# Altium PCB Drone-PCB-v1-ASCII.PcbDoc
Units mil, origin at the board's own origin, x right, y up, seen from the top; angles counter-clockwise.
Board outline 3936.81 x 3930.99 mil, 2 copper layers (Top Layer, Bottom Layer); 82 components, 50 nets, 283 pads, 84 vias.
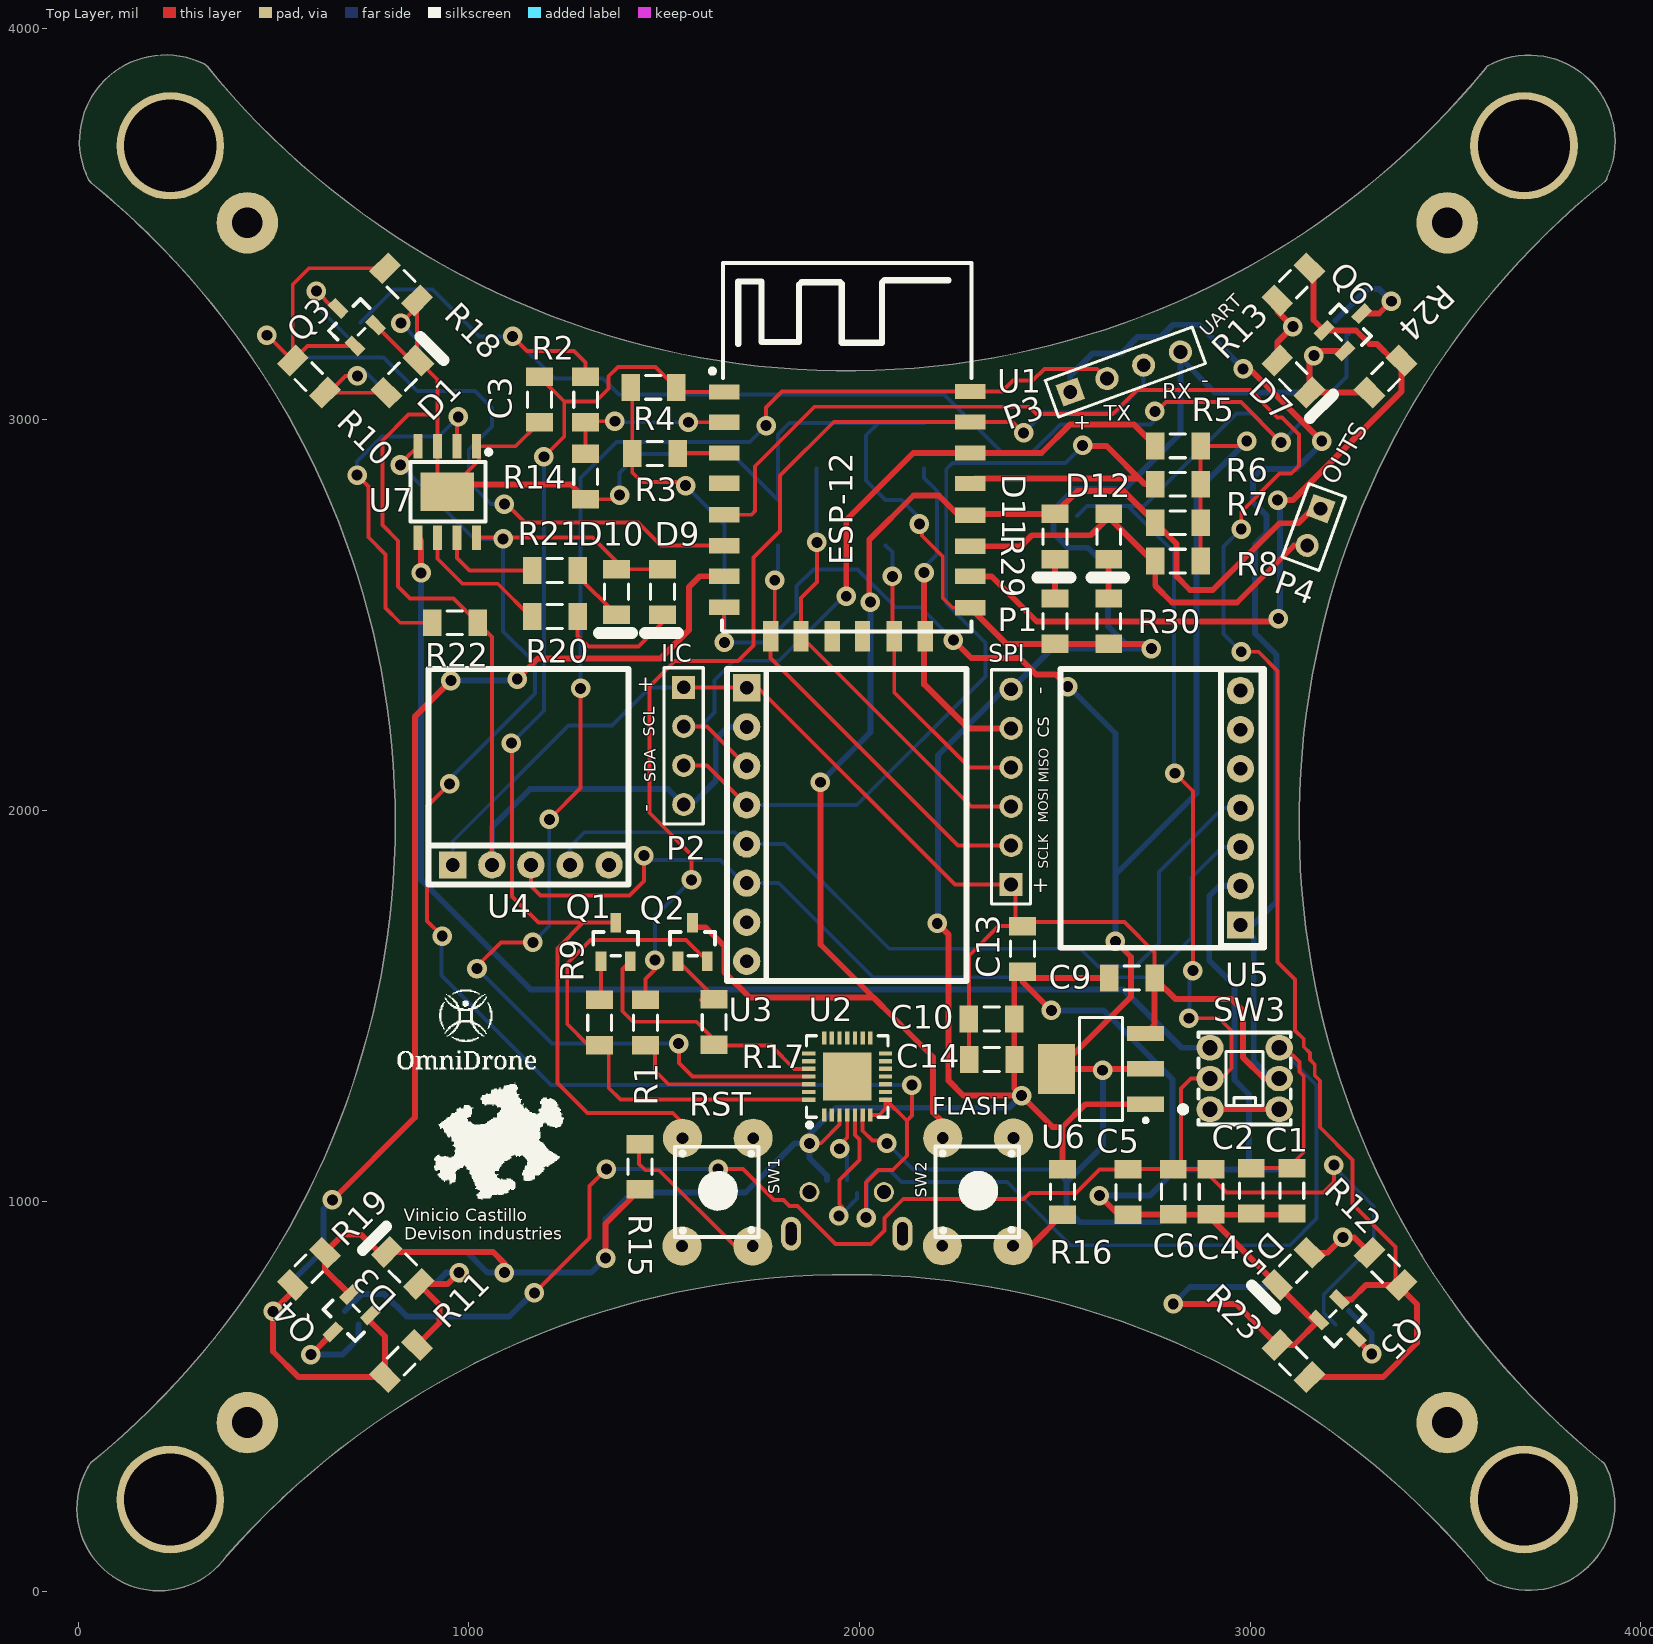
[diagram p0: Top Layer view]
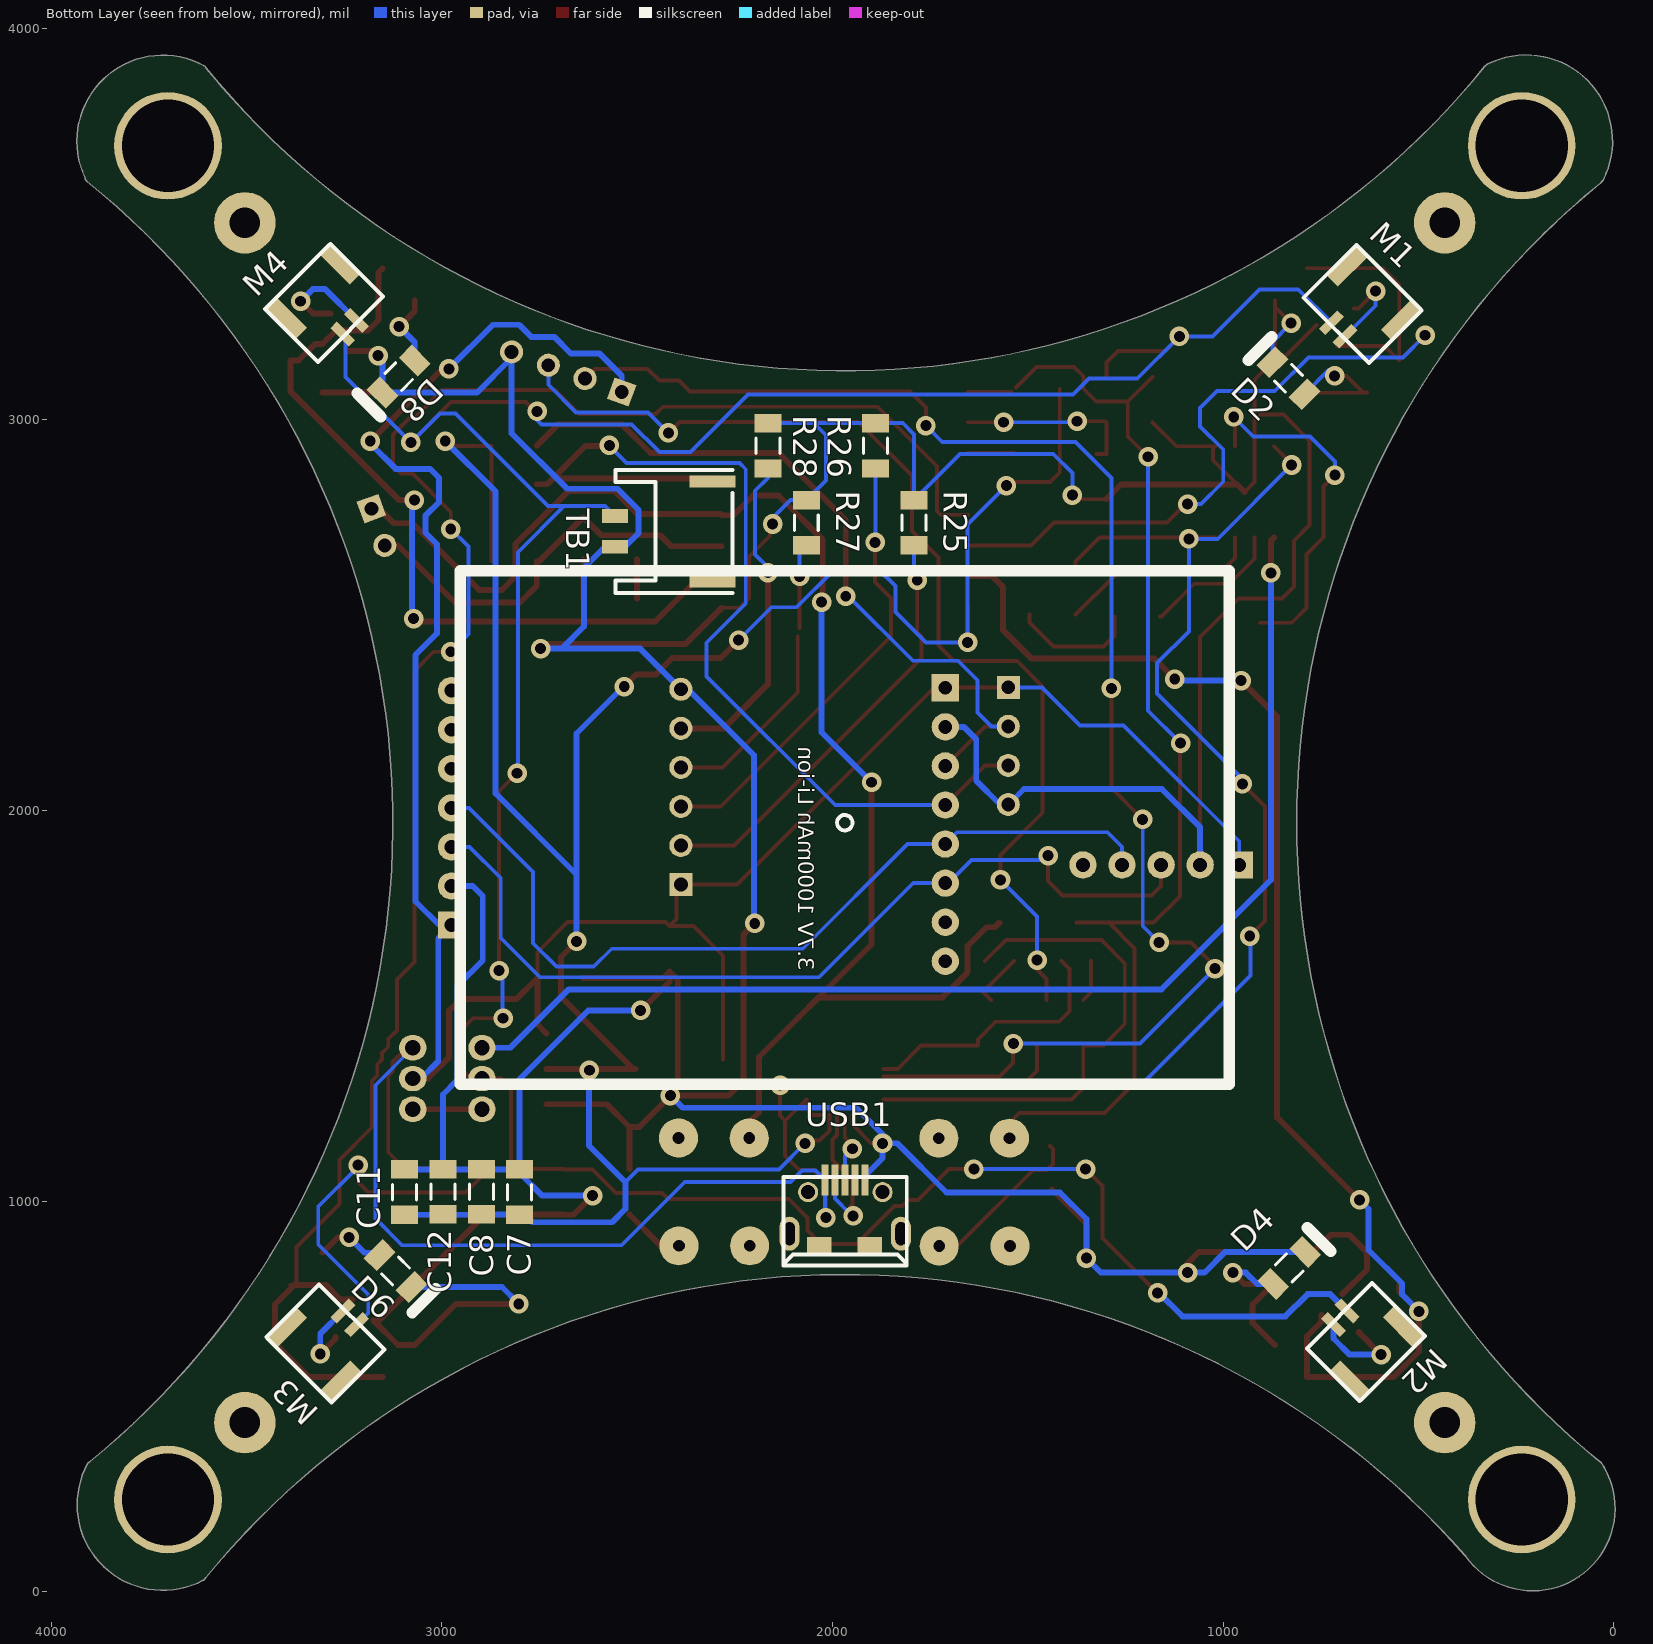
[diagram p1: Bottom Layer view, seen from below]

## Layer stack, top to bottom
Top Layer: signal copper 1.4
Dielectric: dielectric 12.6, FR-4, Dk 4.8
Bottom Layer: signal copper 1.4

## Board outline
31.88,329.67 ccw(c207.88,213.47) 380.49,92.3 ccw(c370.4,103.42) 381.69,93.52 cw(c1968.5,-1299.21) 3603.55,36.56 ccw(c3615.18,46.06) 3604.94,35.08 ccw(c3618.01,42.48) 3610.99,29.21 ccw(c3713.6,223.24) 3933.08,223.24 ccw(c3713.6,223.24) 3906.95,327.12 ccw(c3893.72,320.01) 3900.49,333.41 3900.5,333.41 cw(c5236.22,1968.5) 3907.62,3609.39 ccw(c3898.17,3621.06) 3913.12,3619.7 ccw(c3713.77,3712.83) 3933.8,3712.83 ccw(c3713.77,3712.83) 3609.28,3906.46 ccw(c3616.41,3893.25) 3602.73,3899.44 cw(c1968.5,5236.22) 330.3,3904.31 ccw(c318.65,3894.84) 326.06,3907.9 ccw(c315.48,3897.25) 322.14,3910.71 ccw(c224.25,3712.95) 27.17,3613.69 ccw(c40.58,3620.45) 32.4,3607.86 ccw(c44.96,3616.08) 35.47,3604.45 cw(c-1299.21,1968.5) 812.11,1968.5 cw(c-1299.21,1968.5) 38.9,335.36 ccw(c44.41,321.4)

## Design rules (kind name [scope] priority, off if disabled: settings)
AssemblyTestPointUsage [All] p0: scope1count=1 scope1_0_kind=Board scope1_0_value=Board scope2count=1 scope2_0_kind=Board scope2_0_value=Board commentlength=0
AssemblyTestpoint [All] p0: scope1count=1 scope1_0_kind=Board scope1_0_value=Board scope2count=1 scope2_0_kind=Board scope2_0_value=Board commentlength=0
Clearance [All] p0: scope1count=1 scope1_0_kind=Board scope1_0_value=Board scope2count=1 scope2_0_kind=Board scope2_0_value=Board commentlength=0 gap=5
Clearance [All] p1: gap=5
ComponentClearance [All] p0: scope1count=1 scope1_0_kind=Board scope1_0_value=Board scope2count=1 scope2_0_kind=Board scope2_0_value=Board commentlength=0 gap=0.39 collisioncheckmode=3
ComponentClearance [All] p1: gap=0.39 collisioncheckmode=3 verticalgap=10 showdistances=FALSE
DiffPairsRouting [All] p0: scope1count=1 scope1_0_kind=Board scope1_0_value=Board scope2count=1 scope2_0_kind=Board scope2_0_value=Board commentlength=0
FabricationTestPointUsage [All] p0: scope1count=1 scope1_0_kind=Board scope1_0_value=Board scope2count=1 scope2_0_kind=Board scope2_0_value=Board commentlength=0 valid=0 allowmultiple=FALSE
FabricationTestpoint [All] p0: scope1count=1 scope1_0_kind=Board scope1_0_value=Board scope2count=1 scope2_0_kind=Board scope2_0_value=Board commentlength=0 side=3 testpointundercomponent=TRUE minsize=40 maxsize=100 preferedsize=60 minholesize=0 maxholesize=40 preferedholesize=32 testpointgrid=1
FanoutControl Fanout_Default [All] p0: scope1count=1 scope1_0_kind=Board scope1_0_value=Board scope2count=1 scope2_0_kind=Board scope2_0_value=Board commentlength=30 // Fanout_Default (Default Rule)
FanoutControl Fanout_Small [All] p0 off: scope1count=1 scope1_0_kind=Board scope1_0_value=Board scope2count=1 scope2_0_kind=Board scope2_0_value=Board commentlength=84 // Protel DXP Scope 1 Expression Was: (CompPinCount < 5)   Fanout_Small (Default Rule)
FanoutControl Fanout_SOIC [All] p0 off: scope1count=1 scope1_0_kind=Board scope1_0_value=Board scope2count=1 scope2_0_kind=Board scope2_0_value=Board commentlength=71 // Protel DXP Scope 1 Expression Was: IsSOIC   Fanout_SOIC (Default Rule)
FanoutControl Fanout_LCC [All] p0 off: scope1count=1 scope1_0_kind=Board scope1_0_value=Board scope2count=1 scope2_0_kind=Board scope2_0_value=Board commentlength=69 // Protel DXP Scope 1 Expression Was: IsLCC   Fanout_LCC (Default Rule)
FanoutControl Fanout_BGA [All] p0 off: scope1count=1 scope1_0_kind=Board scope1_0_value=Board scope2count=1 scope2_0_kind=Board scope2_0_value=Board commentlength=69 // Protel DXP Scope 1 Expression Was: IsBGA   Fanout_BGA (Default Rule)
Height [All] p0: scope1count=1 scope1_0_kind=Board scope1_0_value=Board scope2count=1 scope2_0_kind=Board scope2_0_value=Board commentlength=0
HoleSize [All] p0: scope1count=1 scope1_0_kind=Board scope1_0_value=Board scope2count=1 scope2_0_kind=Board scope2_0_value=Board commentlength=0 absolutevalues=TRUE maxlimit=100 minlimit=1 maxpercent=80.000 minpercent=20.000
HoleToHoleClearance [All] p0: scope1count=1 scope1_0_kind=Board scope1_0_value=Board scope2count=1 scope2_0_kind=Board scope2_0_value=Board commentlength=0
LayerPairs [All] p0: scope1count=1 scope1_0_kind=Board scope1_0_value=Board scope2count=1 scope2_0_kind=Board scope2_0_value=Board commentlength=0 enforce=TRUE
MinimumSolderMaskSliver [All] p0: scope1count=1 scope1_0_kind=Board scope1_0_value=Board scope2count=1 scope2_0_kind=Board scope2_0_value=Board commentlength=0
NetAntennae [All] p0: scope1count=1 scope1_0_kind=Board scope1_0_value=Board scope2count=1 scope2_0_kind=Board scope2_0_value=Board commentlength=0
PasteMaskExpansion [All] p0: scope1count=1 scope1_0_kind=Board scope1_0_value=Board scope2count=1 scope2_0_kind=Board scope2_0_value=Board commentlength=0 expansion=0
PlaneClearance [All] p0: scope1count=1 scope1_0_kind=Board scope1_0_value=Board scope2count=1 scope2_0_kind=Board scope2_0_value=Board commentlength=0 clearance=20
PlaneConnect [All] p0: scope1count=1 scope1_0_kind=Board scope1_0_value=Board scope2count=1 scope2_0_kind=Board scope2_0_value=Board commentlength=0 planeconnectstyle=Relief reliefexpansion=20 reliefentries=4 reliefconductorwidth=10 reliefairgap=10
PolygonConnect [All] p0: scope1count=1 scope1_0_kind=Board scope1_0_value=Board scope2count=1 scope2_0_kind=Board scope2_0_value=Board commentlength=0 connectstyle=Relief reliefconductorwidth=10 reliefentries=4 polygonreliefangle="90 Angle"
PolygonConnect [All] p1: connectstyle=Relief reliefconductorwidth=10 reliefentries=4 polygonreliefangle="90 Angle" airgapwidth=10
RoutingCorners [All] p0: scope1count=1 scope1_0_kind=Board scope1_0_value=Board scope2count=1 scope2_0_kind=Board scope2_0_value=Board commentlength=0 cornerstyle=45-Degree minsetback=100 maxsetback=100
RoutingLayers [All] p0: scope1count=1 scope1_0_kind=Board scope1_0_value=Board scope2count=1 scope2_0_kind=Board scope2_0_value=Board commentlength=0 top layer=Automatic bottom layer=Automatic
RoutingPriority [All] p0: scope1count=1 scope1_0_kind=Board scope1_0_value=Board scope2count=1 scope2_0_kind=Board scope2_0_value=Board commentlength=0
RoutingTopology [All] p0: scope1count=1 scope1_0_kind=Board scope1_0_value=Board scope2count=1 scope2_0_kind=Board scope2_0_value=Board commentlength=0 topology=Shortest
RoutingVias [All] p0: scope1count=1 scope1_0_kind=Board scope1_0_value=Board scope2count=1 scope2_0_kind=Board scope2_0_value=Board commentlength=0 holewidth=28 width=50 viastyle="Through Hole" minholewidth=28 minwidth=50 maxholewidth=28 maxwidth=50
RoutingVias [All] p1: holewidth=28 width=50 viastyle="Through Hole" minholewidth=28 minwidth=50 maxholewidth=28 maxwidth=50
ShortCircuit [All] p0: scope1count=1 scope1_0_kind=Board scope1_0_value=Board scope2count=1 scope2_0_kind=Board scope2_0_value=Board commentlength=0 allowed=FALSE
SilkToSilkClearance [All] p0: scope1count=1 scope1_0_kind=Board scope1_0_value=Board scope2count=1 scope2_0_kind=Board scope2_0_value=Board commentlength=0
SilkToSolderMaskClearance [All] p0 off: scope1count=1 scope1_0_kind=Board scope1_0_value=Board scope2count=1 scope2_0_kind=Board scope2_0_value=Board commentlength=44 // Protel DXP Scope 1 Expression Was: IsPad
SolderMaskExpansion [All] p0: scope1count=1 scope1_0_kind=Board scope1_0_value=Board scope2count=1 scope2_0_kind=Board scope2_0_value=Board commentlength=0 expansion=4
SolderMaskExpansion [All] p1: expansion=4
UnRoutedNet [All] p0: scope1count=1 scope1_0_kind=Board scope1_0_value=Board scope2count=1 scope2_0_kind=Board scope2_0_value=Board commentlength=0
Width [All] p0: scope1count=1 scope1_0_kind=Board scope1_0_value=Board scope2count=1 scope2_0_kind=Board scope2_0_value=Board commentlength=0 maxlimit=30 minlimit=10 preferedwidth=15
Width [All] p1: maxlimit=30 minlimit=10 preferedwidth=15
27 further rules are at their usual default settings.

## Components (designator, comment, footprint, x,y, rotation, side; value= is the part's Value field where it differs from the comment)
C1 "10uF" 1206CAP 3106.46,1026.38 r90 top
C2 "100nF" 1206CAP 3002.57,1026.38 r90 top
C3 "100nF" 1206CAP 1181.1,3051.18 r90 top
C4 "100uF" 1206CAP 2900,1024 r90 top
C5 "100nF" 1206CAP 2687,1023 r90 top
C6 "100nF" 1206CAP 2803,1024 r90 top
C7 "10uF" 1206CAP 2801,1023 r270 bottom
C8 "10uF" 1206CAP 2898,1024 r270 bottom
C9 "10uF" 1206CAP 2697,1571 r0 top
C10 "10uF" 1206CAP 2338,1466 r180 top
C11 "100nF" 1206CAP 3095,1023 r270 bottom
C12 "100nF" 1206CAP 2997,1024 r270 bottom
C13 "100nF" 1206CAP 2417.32,1645.67 r90 top
C14 "100nF" 1206CAP 2338.58,1362.2 r180 top
D1 "LED" 1206DIODE 830,3110 r45 top
D2 "LED" 1206DIODE 833,3106 r45 bottom
D3 "LED" 1206DIODE 831,829 r135 top
D4 "LED" 1206DIODE 831,829 r135 bottom
D5 "LED" 1206DIODE 3110.24,826.77 r225 top
D6 "LED" 1206DIODE 3118,821 r225 bottom
D7 "LED" 1206DIODE 3110.24,3110.24 r315 top
D8 "LED" 1206DIODE 3110.24,3110.24 r315 bottom
D9 "LED" 1206DIODE 1496.06,2559.06 r270 top
D10 "LED" 1206DIODE 1377.95,2559.06 r270 top
D11 "LED" 1206DIODE 2500,2700.79 r270 top
D12 "LED" 1206DIODE 2637.8,2700.79 r270 top
M1 "TBX2X1" "JST 1.25mm" 794,3312 r225 bottom
M2 "TBX2X1" "JST 1.25mm" 619,790 r315 bottom
M3 "TBX2X1" "JST 1.25mm" 3147,620 r45 bottom
M4 "TBX2X1" "JST 1.25mm" 3317,3148 r135 bottom
P1 "SPI" HDR1X6 2388,1810 r90 top
P2 "IIC" HDR1X4 1550,2315 r270 top
P3 "UART" HDR1X4 2539.37,3070.87 r20 top
P4 "OUTS" HDR1X2 3180,2772 r250 top
Q1 "S8050" SOT-23(SOT-23-3) 1338.58,1614.17 r0 top
Q2 "S8050" SOT-23(SOT-23-3) 1535.43,1614.17 r0 top
Q3 "SI2302" SOT-23(SOT-23-3) 708.66,3188.98 r45 top
Q4 "SI2302" SOT-23(SOT-23-3) 748.03,708.66 r135 top
Q5 "SI2302" SOT-23(SOT-23-3) 3228.35,748.03 r225 top
Q6 "SI2302" SOT-23(SOT-23-3) 3188.98,3228.35 r315 top
R1 "470" 1206RES 1452,1457 r90 top
R2 "12K" 1206RES 1299.21,3051.18 r270 top
R3 "3K3" 1206RES 1476.38,2913.39 r180 top
R4 "3K3" 1206RES 1472.44,3082.68 r180 top
R5 "3K3" 1206RES 2814.96,2933.07 r0 top
R6 "3K3" 1206RES 2814.96,2834.65 r0 top
R7 "3K3" 1206RES 2814.96,2736.22 r0 top
R8 "3K3" 1206RES 2814.96,2637.8 r0 top
R9 "12K" 1206RES 1335,1457 r90 top
R10 "470" 1206RES 590.55,3110.24 r135 top
R11 "470" 1206RES 826.77,590.55 r225 top
R12 "470" 1206RES 3346.46,826.77 r315 top
R13 "470" 1206RES 3110.24,3346.46 r45 top
R14 "12K" 1206RES 1299.21,2854.33 r270 top
R15 "470" 1206RES 1438,1088 r90 top
R16 "470" 1206RES 2519.68,1023.62 r270 top
R17 "12K" 1206RES 1628,1458 r90 top
R18 "33K" 1206RES 826.77,3346.46 r315 top
R19 "33K" 1206RES 590.55,826.77 r45 top
R20 "1.2K" 1206RES 1220.47,2496.06 r180 top
R21 "1.2K" 1206RES 1220.47,2614.17 r180 top
R22 "1.2K" 1206RES 964.57,2480.32 r180 top
R23 "33K" 1206RES 3110.24,590.55 r135 top
R24 "33K" 1206RES 3346.46,3110.24 r225 top
R25 "3K3" 1206RES 1791.34,2736.22 r270 bottom
R26 "3K3" 1206RES 1889.76,2933.07 r270 bottom
R27 "3K3" 1206RES 2066.93,2736.22 r270 bottom
R28 "3K3" 1206RES 2165.35,2933.07 r270 bottom
R29 "470" 1206RES 2500,2484.25 r270 top
R30 "470" 1206RES 2637.8,2484.25 r270 top
SW1 "PUSH BUTTON" "Push Button" 1633.86,1022.62 r0 top
SW2 "PUSH BUTTON" "Push Button" 2300,1023 r0 top
SW3 "SW DPDT" "DPDT SW" 2897,1235 r0 top
TB1 "TB_BATT" "2P PH2.0mm Pitch" 2594,2876 r270 bottom
U1 "ESP-12E" ESP-12E 1653.5,3070.87 r0 top
U2 "CP2102" CP2102 1968.5,1318.9 r90 top
U3 "MPU6050" "MPU6050 - PCB MODULE" 1661.2,1563.8 r0 top
U4 "HMC5883L" "HMC5883L - PCB MODULE" 1409,1810.33 r90 top
U5 "MS5611" "MS5611 - PCB MODULE" 3035,2361.51 r180 top
U6 "KIA1117-3.3" KIA1117-3.3 2618.11,1338.58 r180 top
U7 "TP4056" TP4056 944.88,2814.96 r270 top
USB1 "USB Connector" "USB micro Female" 2127.4,1063 r270 bottom

## Footprints (in the part's own frame and the unit in brackets; to place one, negate y for a bottom-side part, rotate by r counter-clockwise, add the part's x,y. Pads: shape width x height; smd on the part's side, far side on the other; paste and mask are expansions set on the pad)
"2P PH2.0mm Pitch" [mm]
  rect 0.9x1.7 smd: 1(3.116,0.94) 2(5.116,0.94)
  rect 0.8x3 smd: MP1(7.366,7.29) MP2(0.866,7.29)
  silkscreen extent 0.12,0.99 8.12,8.59
1206CAP [mm] "Chip Resistor, 2-Leads, Body 3,10x1,57mm, IPC Medium Density"
  rect 1.2x1.75 smd: 1(-1.475,0) 2(1.475,0)
  silkscreen extent -0.5,-0.77 0.5,0.77
1206DIODE [mm]
  rect 1.2x1.75 smd: 1(-1.475,0) 2(1.475,0)
  silkscreen extent -0.5,-1.14 2.67,1.02
1206RES [mm] "Chip Resistor, 2-Leads, Body 3,10x1,57mm, IPC Medium Density"
  rect 1.2x1.75 smd: 1(-1.475,0) 2(1.475,0)
  silkscreen extent -0.5,-0.77 0.5,0.77
CP2102 [mm] "USB to UART Interface IC 3.3v"
  rect 0.85x0.28 smd: 1(-2.5,1.501) 2(-2.5,1.001) 3(-2.5,0.5) 4(-2.5,0) 5(-2.5,-0.5) 6(-2.5,-1.001) 7(-2.5,-1.501) 15(2.5,-1.501) 16(2.5,-1.001) 17(2.5,-0.5) 18(2.5,0) 19(2.5,0.5) 20(2.5,1.001) 21(2.5,1.501)
  rect 0.28x0.85 smd: 8(-1.501,-2.5) 9(-1.001,-2.5) 10(-0.5,-2.5) 11(0,-2.5) 12(0.5,-2.5) 13(1.001,-2.5) 14(1.501,-2.5) 22(1.501,2.5) 23(1.001,2.5) 24(0.5,2.5) 25(0,2.5) 26(-0.5,2.5) 27(-1.001,2.5) 28(-1.501,2.5)
  rect 3.13x3.13 smd: 10(0,0)
  silkscreen extent -3.3,-2.65 2.65,2.65
"DPDT SW" [mil] "DPDT Switch"
  oval 70x65 hole 39.37: 1(0,0) 2(0,78.74) 3(0,157.48) 4(177.16,0) 5(177.16,78.74) 6(177.16,157.48)
  silkscreen extent -77,-39 207,197
ESP-12E [mm] "ESP8266 MCU based WIFI PCB Module"
  rect 2x1 smd: 1(0,0) 2(0,-1.97) 3(0,-3.97) 4(0,-5.94) 5(0,-7.98) 6(0,-9.99) 7(0,-11.98) 8(0,-13.99) 15(16,-14.03) 16(16,-11.99) 17(16,-10.03) 18(16,-8.01) 19(16,-5.95) 20(16,-3.97) 21(16,-1.95) 22(16,0.03)
  rect 1x2 smd: 9(3.018,-15.877) 10(4.998,-15.877) 11(7.018,-15.877) 12(8.998,-15.877) 13(11.058,-15.877) 14(13.078,-15.877)
  silkscreen extent -0.91,-15.57 16.08,8.37
HDR1X2 [mm] "Connector; Header; 2 Position"
  rect 1.5x1.5 hole 0.9: 1(0,0)
  round 1.5 hole 0.9: 2(2.54,0)
  silkscreen extent -1.27,-1.27 3.81,1.27
HDR1X4 [mm] "Connector; Header; 4 Position"
  rect 1.5x1.5 hole 0.9: 1(0,0)
  round 1.5 hole 0.9: 2(2.54,0) 3(5.08,0) 4(7.62,0)
  silkscreen extent -1.27,-1.27 8.89,1.27
HDR1X6 [mm] "Connector; Header; 6 Position"
  rect 1.5x1.5 hole 0.9: 1(0,0)
  round 1.5 hole 0.9: 2(2.54,0) 3(5.08,0) 4(7.62,0) 5(10.16,0) 6(12.7,0)
  silkscreen extent -1.27,-1.27 13.97,1.27
"HMC5883L - PCB MODULE" [mil] "HMC5883L or QMC5883L"
  rect 70x70 hole 35.43: 1(50,450)
  round 70 hole 35.43: 2(50,350) 3(50,250) 4(50,150) 5(50,50)
  silkscreen extent 0,0 551,512
"JST 1.25mm" [mm] "JST 1.25mm, 2 pins, SMD"
  rect 0.6x1.7 smd: 1(2.423,0.13) 2(3.673,0.13)
  rect 1x2.8 smd: 3(0.573,3.48) 4(5.523,3.48)
  silkscreen extent 0,0 5.99,4.85
KIA1117-3.3 [mm] "LOD and Fixed positive voltage regulator 3.3V 1A"
  rect 2.4x1 smd: 1(-2.9,2.3) 2(-2.9,0) 3(-2.9,-2.3)
  rect 2.4x3.25 smd: 2(2.9,0)
  silkscreen extent -3.03,-3.35 1.4,3.47
"MPU6050 - PCB MODULE" [mil] "3 Axis Analog Gyro Sensors+ 3 Axis Accelerometer Module, IIC"
  rect 70x70 hole 35.43: 1(50,750)
  round 70 hole 35.43: 2(50,650) 3(50,550) 4(50,450) 5(50,350) 6(50,250) 7(50,150) 8(50,50)
  silkscreen extent 0,0 613,798
"MS5611 - PCB MODULE" [mil] "MS5611-01BA03 Atmospheric Pressure Sensor Module Meter Altimeter Sensor Module, IIC/SPI"
  rect 70x70 hole 35.43: 1(60,655)
  round 70 hole 35.43: 2(60,555) 3(60,455) 4(60,355) 5(60,255) 6(60,155) 7(60,55)
  silkscreen extent 0,0 521,713
"Push Button" [mil]
  round 100 hole 30: 0(-88,-137.5) 0(94,138.5) 1(-87,138.5) 2(93,-137.5)
  silkscreen extent -106,-114 108,116
SOT-23(SOT-23-3) [mm] "SOT-23(SOT-23-3) Package"
  rect 0.7x1.25 smd: 1(0,0) 2(1.9,0) 3(0.95,2.499)
  silkscreen extent -0.51,0.35 2.41,1.9
TP4056 [mm] "1A Standalone Linear Li-lon Battery Charger with Thermal  Regulation in SOP-8"
  rect 1.6x0.6 smd: 1(-2.972,1.905) 2(-2.972,0.635) 3(-2.972,-0.635) 4(-2.972,-1.905) 5(2.972,-1.905) 6(2.972,-0.635) 7(2.972,0.635) 8(2.972,1.905)
  rect 2.5x3.5 smd: 3(0,0)
  silkscreen extent -2.74,-2.39 1.93,2.84
"USB micro Female" [mm] "MICRO USB 5S B Type"
  round 1.3 hole 0.9: 0(1.016,1.651) 0(1.016,6.492)
  oval 2.2x1.3 hole 0.7 slot 1.5 at 0 deg: 0(3.716,0.442) 0(3.716,7.681)
  rect 1.2x1.6 smd: 0(4.527,2.378) 0(4.543,5.657)
  rect 2x0.45 smd: 1(0.231,2.751) 2(0.231,3.401) 3(0.231,4.051) 4(0.231,4.701) 5(0.231,5.351)
  silkscreen extent 0.03,0.06 5.79,8.06

## Part data
C1 C2 C3 C4 C5 C6 C7 C8 C9 C10 C11 C12 C13 C14: library part Capacitor
D1 D2 D3 D4 D5 D6 D7 D8 D9 D10 D11 D12: "Ligth Emitting Diode (LED)"
M1 M2 M3 M4: "Terminal Block 2 pins, 1 row"
P1: library part "Header 6", "Header, 6-Pin"
P2 P3: library part "Header 4", "Header, 4-Pin"
P4: library part "Header 2", "Header, 2-Pin"
Q1 Q2: "Transistor NPN 500mA 25V SOT-23(SOT-23-3) RoHS"
Q3 Q4 Q5 Q6: "MOSFET N Trench 20V 2.1A 1.2V @ 50uA 72 mO @ 3.6A,4.5V SOT-23(SOT-23-3) RoHS"
R1 R2 R3 R4 R5 R6 R7 R8 R9 R10 R11 R12 R13 R14 R15 R16 R17 R18 R19 R20 R21 R22 R23 R24 R25 R26 R27 R28 R29 R30: library part Resistor, "Passive component"
SW1 SW2: "Normally Open (NO) button"
SW3: "DPDT Switch"
TB1: "Battery terminal block"
U1: "ESP8266 MCU based WIFI PCB Module"
U2: "USB to UART interface IC 3.3v"
U3: "PCB Module, 3 Axis Analog Gyro Sensors+ 3 Axis Accelerometer, IIC"
U4: "PCB Module, Triple Axis Compass Magnetometer Sensor Module, IIC Conn"
U5: "PCB Module, Atmospheric Pressure Sensor Module Meter Altimeter Sensor Module, IIC"
U6: "LOD and Fixed positive voltage regulator 3.3V 1A"
U7: "1A Standalone Linear Li-lon Battery Charger with Thermal  Regulation in SOP-8"
USB1: library part USB

## Free pads (board coordinates)
  round 275.59 hole 236.22: 0(236.22,236.22) 0(236.22,3700.79) 0(3700.79,236.22) 0(3700.79,3700.79)
  round 157.48 hole 78.74: 0(433.07,433.07) 0(433.07,3503.94) 0(3503.94,433.07) 0(3503.94,3503.94)

## Via types
v1: diameter 50, hole 28, Top Layer to Bottom Layer, 84 vias

## Nets (pads, with @x,y where several pads share a name; then routed paths per layer and width w, separated by ;. In a path a pad name is that pad's centre, name@x,y a point inside that pad or via, vN(x,y) a via of type N, cw(c..) or ccw(c..) an arc to the next point about the centre after c; other vN are vias at no path point)
3.3V: C7.2 C8.2 C11.2 C12.2 R3.2 R4.2 R5.2 R6.2 R7.2 R8.2 U1.8 U2.6 U6.2 | length 6606.3
  Top Layer w10: R4.2@1418.31,3078.74 R3.2 1418.31,2864.69 1443,2840 1564,2840 v1(1555,2831) ; U1.8 1653.5,2430.5 v1(1654,2430) ; U2.6 2007.9,1180.1 2033,1155 v1@2056,1155 ; R8.2 R7.2 R6.2 R5.2 2980.07,2933.07 2991,2944 v1(2991,2945)
  Top Layer w15: v1(2240,2436) 2286,2390 2410,2390 2452,2348 2502,2348 v1(2533,2317) ; U6.2@2503.94,1338.58 U6.2@2510.58,1338.58 ; v1@2617.5,1330.5 2609.42,1338.58 U6.2@2510.58,1338.58 ; v1@2636.58,1338.58 U6.2@2732.28,1338.58 ; v1(2655,1665) 2695,1625 2695,1523 U6.2@2510.58,1338.58
  Bottom Layer w10: v1(1555,2831) 1654,2732 v1(1654,2430) 1761,2430 1839,2508 1839,2574 1882,2617 1995,2617 2092,2520 2156,2520 v1(2240,2436) ; v1(2070,1148) 2137,1081 2498,1081 2530,1049
  Bottom Layer w15: v1(2533,2317) 2535,2317 2655,2197 2655,1836 ; v1@2623,1325 2623,1142 2530,1049 2530,980 2564,946 2767,946 2785.93,964.93 C7.2 ; v1(2655,1665) 2655,1836 ; C7.2@2802,965.93 C8.2 ; C8.2@2898,964.93 C11.2 ; v1(2991,2945) 2862,2816 2862,2043 2655,1836
  other v1: 2622,1335
5V: C1.2 C2.2 D9.1 D10.1 SW3.6 U2.7 U2.8 U7.4 U7.8 USB1.1 | length 6407.2
  Top Layer w10: v1(825,2884) 814,2895 832.92,2895 U7.4 ; v1(932,1678) 893,1717 893,2010 v1(951,2068) ; U7.8 v1@1088,2697.96 ; v1@1090.96,2697.96 1317.04,2697.96 1377.95,2637.05 D10.1 D9.1 ; v1(2017,958) 2017,1048 2049,1080 2085,1080 2121,1116 2121,1205.73 ; U2.7 2050.48,1220.48 2066.93,1236.93 U2.8 2121,1205.73 ; v1(2134,1297) 2134,1218.73 2121,1205.73 ; C2.2 C1.2 3106.46,1094.46 3137,1125 3137,1320 3126,1331 3126,1356 3089.52,1392.48 SW3.6
  Bottom Layer w10: v1(825,2884) 1014,2695 v1(1088,2695) 1088,2458 1169,2377 1169,2299 957,2087 957,2074 v1(951,2068) ; v1@930,1681 930,1577 1210,1297 v1(2134,1297) ; v1(2017,958) 2019.09,960.09 USB1.1 2043.2,1078 2078,1078 2107,1049 2378,1049 2540,887 3102,887 3170,955 3170,1296.64 SW3.6
+B: C4.2 C5.2 C6.2 M1.1 M2.1 M3.1 M4.1 R2.1 SW3.2 TB1.1 | length 9500
  Top Layer w10: v1(1112,3213) 1149,3176 1269,3176 1299.21,3145.79 R2.1 ; v1(1168,765) 1309,906 1309,1039 v1(1352,1082) ; v1(1638,1082) 1702,1082 1781,1003 1805,1003 1821,987 1841,987 1938,890 2029,890 2064,925 2064,957 2112,1005 2420,1005 2436,1021 2554,1021 2614.07,1081.07 C5.2 2688,1082.07 C6.2 ; v1@2765,3008 2765,3026 2784,3045 2976,3045 v1(3079,2942) ; v1(2807,2095) 2853,2049 v1(2853,1590) ; v1@2845,1456 2857,1468 2920,1468 2952,1436 2952,1340 2925.74,1313.74 SW3.2 2848.74,1313.74 2823,1288 2823,1102.07 C6.2 ; v1(3214,1092) 3214,1049 3187,1022 2939,1022 2900,1061 C4.2 C6.2
  Bottom Layer w10: M1.1 808,3333.22 906.78,3333.22 1027,3213 v1(1112,3213) 1220,3105 1343,3105 1384,3064 2216,3064 2363,2917 2443,2917 2514,2988 2745,2988 v1@2765,3008 ; v1@1167,766 v1(1168,765) ; v1(1352,1082) v1(1638,1082) ; TB1.1 2582.3,2778.63 2687,2778.63 ; v1@2805,2095 2805,2660.63 2687,2778.63 ; v1@2845,1456 2845,1582 v1(2853,1590) ; v1@3217,1085 3316,986 3316,889 3188,761 3188,713.9 M3.1 ; M4.1 3246.06,3219.06 3246.06,3109.06 v1(3079,2942) 3005,3016 2965,3016 2727.63,2778.63 2687,2778.63
  Bottom Layer w15: M2.1 725.9,762 784,762 841,705 1104,705 v1@1166,767
  other v1: 2843,1468 2756,3021
ESP_RX: P3.3 R1.2 U1.21 | length 2769
  Top Layer w10: R1.2 1452,1568 1476.38,1592.38 v1(1476.38,1616.62) ; v1(1570,1822) 1570,1886 1462,1994 1462,2317 1527,2382 1689,2382 1729,2422 1729,2647 1797,2715 1797,2857 1934.09,2994.09 U1.21 2391.91,2994.09 v1(2420,2966)
  Bottom Layer w10: v1(1476.38,1616.62) 1476.38,1728.38 v1(1570,1822) ; v1(2420,2966) 2472,3018 2656,3018 2727.31,3089.31 P3.3
ESP_TX: P3.2 U1.22 U2.25 | length 3926.5
  Top Layer w10: v1(1021,1595) 1021,1601 1082,1662 v1(1164,1662) ; v1(1206,1977) 1286,2057 v1(1286,2312) ; v1@1552,1403 1538,1389 1538,1353 1572.1,1318.9 U2.25 ; v1(1761,2985) 1761,3031 1802.05,3072.05 U1.22 2365.05,3072.05 2393,3100 2443,3100 2473,3130 2608.41,3130 P3.2
  Bottom Layer w10: v1(1021,1595) 1213,1403 v1@1552,1403 ; v1(1164,1662) 1206,1704 v1(1206,1977) ; v1(1286,2312) 1286,2851 1378,2943 1719,2943 v1(1761,2985)
  other v1: 1537,1403
GND: C1.1 C2.1 C3.1 C4.1 C5.1 C6.1 C7.1 C8.1 C9.1 C10.1 C11.1 C12.1 C13.1 C14.1 D1.2 D2.2 D3.2 D4.2 D5.2 D6.2 D7.2 D8.2 P1.6 P2.4 P3.4 Q3.2 Q4.2 Q5.2 Q6.2 R14.2 R15.1 R16.1 R18.2 R19.2 R22.1 R23.2 R24.2 R25.1 R26.1 R27.1 R28.1 R29.2 R30.2 TB1.2 U1.15 U2.3 U3.2 U4.2 U5.2 U6.1 U7.1 U7.3 USB1.5 | length 17823
  Top Layer w10: Q3.2 852.36,3151.06 D1.2 ; v1(826,3247) R18.2@867.83,3288.83 ; R18.2 R18.2@867.83,3288.83 ; U4.2 1059,2443.95 R22.1 960.95,2542 850,2542 819,2573 819,2690 779,2730 779,2946 846,3013 905,3013 919.88,2998.12 ; C3.1 1119.95,2931.96 U7.1 1026,2925.84 1026,2896.08 944.88,2814.96 919.88,2839.96 919.88,2931.96 919.88,2998.12 ; R14.2 1375.26,2796.26 v1(1386,2807) ; v1(1872,1148) 1901,1148 1948.8,1195.8 U2.3 ; v1@2160,2742 2160,2703 2213,2650 2213,2544 2238.5,2518.5 U1.15 ; R18.2@867.83,3288.83 867.83,3154.29 D1.2 ; D1.2 919.88,3102.24 919.88,2998.12
  Top Layer w15: Q4.2 631.61,825.08 R19.2 677.78,914 725,914 768.94,870.06 D3.2 1061.94,870.06 1091,841 v1(1091,817) ; U7.3@944.88,2814.96 963.92,2834 1261.47,2834 R14.2 ; v1(1350,854) 1350,941.93 R15.1 ; v1(2199,1711) 2228,1682 2228,1308 2266,1270 v1(2415,1270) ; U1.15 2375.75,2426.18 R29.2 R30.2 2734.82,2426.18 v1(2747,2414) ; 2396.07,1287.93 C10.1 2396.07,1566.35 C13.1 ; v1@2414.5,1269.5 2494.32,1189.68 2519.68,1189.68 ; v1(2491,1488) 2417.32,1561.68 C13.1 ; R16.1 2519.68,1189.68 ; v1(2614,1014) 2663.07,964.93 C5.1 2688,965.93 C6.1 ; C9.1 2433.92,1571 C13.1 ; U6.1 2578.03,1248.03 2519.68,1189.68 ; v1(2803,737) 2963.79,737 R23.2 3111.93,631.61 Q5.2 3159.74,695.14 D5.2 2900,954.88 C4.1@2900,964.93 ; C6.1@2803,964.93 C4.1@2900,964.93 ; C4.1 C4.1@2900,964.93 ; C1.1 3103.09,964.93 C4.1@2900,964.93 ; v1(3163,3164) v1@3174.45,3175.45 ; Q6.2 v1@3174.45,3175.45 ; R24.2 D7.2 3151.3,3152.3 v1@3174.45,3175.45
  Bottom Layer w10: v1(826,3247) 874.06,3198.94 D2.2 ; v1(1386,2807) 1386,2863 1435,2912 1673.63,2912 R25.1 1791.34,2962.34 1820.14,2991.14 R26.1 R28.1 2048.14,2991.14 2017,2960 2017,2844.22 R27.1 2107.71,2794.29 v1@2160,2742
  Bottom Layer w15: D4.2 994.94,870.06 1048,817 v1(1091,817) 1313,817 v1(1350,854) 1350,954 1418,1022 1708,1022 1834,1148 v1(1872,1148) ; U4.2 1059,1957 1157,2055 1510,2055 P2.4 1571,2015 1632,2076 1632,2182 1663.8,2213.8 U3.2 ; USB1.5 1916.73,1065.27 1872,1110 v1(1872,1148) ; v1(2199,1711) 2201,1713 2201,2141 2370,2310 P1.6 2492,2414 2693,2414 ; v1(2415,1270) 2414,1270 2383,1239 1940,1239 1872,1171 v1(1872,1148) ; v1(2491,1488) 2625,1488 2801,1312 C7.1 ; v1(2614,1014) 2743,1014 2801,1072 C7.1 ; v1(2747,2414) 2693,2414 ; v1(2803,737) 2845.94,779.94 D6.2 ; U5.2@2941,1807 U5.2@2957.76,1823.76 ; U5.2 2920.51,1806.51 2895,1781 2895,1616 2960,1551 2960,1310 2997,1273 C12.1 ; C11.1 C7.1 ; v1(3163,3164) 3151.3,3152.3 D8.2 2909.83,3069.17 2821.28,3157.72 P3.4 2821.28,2965.28 2679,2823 2550,2823 2496,2769 2496,2710 2534,2672 2585,2672 2636,2621 2636,2471 2693,2414
  other v1: 2153,2733
GPIO0: D11.1 P4.1 Q2.3 R7.1 SW2.1 U1.18 | length 3858.3
  Top Layer w15: Q2.3 1584.41,1701 1606,1701 1654,1653 1654,1586 1718.5,1521.5 2035.5,1521.5 2087,1470 ; v1(1900,2072) 1900,1657 2087,1470 ; v1(2028,2533) 2026,2533 2025,2534 2025,2693 2138,2806 2203,2806 2253.49,2755.51 U1.18 2286.77,2758.86 D11.1 2558.14,2817 2676.11,2817 R7.1 2811,2682.11 2811,2599 2846,2564 2904,2564 3075,2735 3123,2735 3160,2772 P4.1 ; SW2.1 2213,1202 2188,1227 2188,1369 2087,1470
  Bottom Layer w15: v1(1900,2072) 2028,2200 v1(2028,2533)
NetD1_1: D1.1 D2.1 R10.1 | length 367.3
  Top Layer w10: v1(715,3111.88) 684.88,3111.88 642.17,3069.17 R10.1 631.85,3068.94 D1.1
  Bottom Layer w10: v1(715,3111.88) 730,3126.88 D2.1
NetD3_1: D3.1 D4.1 R11.1 | length 431.9
  Top Layer w15: R11.1 925,688.78 925,735 D3.1 945.94,787.94 v1(975,817)
  Bottom Layer w15: D4.1 912.94,787.94 942,817 v1(975,817)
NetD5_1: D5.1 D6.1 R12.1 | length 318.9
  Top Layer w15: D5.1@3136,883.13 3154.08,872.62 D5.1@3162.3,867.83 ; D5.1 D5.1@3162.3,867.83 ; R12.1 3266.23,907 v1(3237,907) 3197.83,867.83 D5.1@3162.3,867.83
  Bottom Layer w15: D6.1@3151.3,867.83 3197.83,867.83 v1(3237,907)
NetD7_1: D7.1 D8.1 R13.1 | length 290.3
  Top Layer w15: D7.1 3069.17,3198.17 v1(3109,3238) 3069.17,3277.83 R13.1
  Bottom Layer w15: D8.1 3069.17,3198.17 v1(3109,3238)
NetD9_2: D9.2 R20.1 | length 324.1
  Top Layer w10: R20.1 1278.54,2446.46 1306,2419 1434,2419 1496.06,2481.06 D9.2
NetD10_2: D10.2 R21.1 | length 154.4
  Top Layer w10: R21.1 1278.54,2600.39 D10.2
NetD11_2: D11.2 R29.1 | length 100.4
  Top Layer w15: R29.1 D11.2
NetD12_2: D12.2 R30.1 | length 100.4
  Top Layer w15: R30.1 D12.2
NetM1_2: M1.2 Q3.3 | length 221.8
  Top Layer w10: v1(610,3329) 654,3285 Q3.3
  Bottom Layer w10: v1(610,3329) 610,3291.52 M1.2
NetM2_2: M2.2 Q4.3 | length 256.1
  Top Layer w15: v1(596,607) 652.01,663.01 Q4.3
  Bottom Layer w15: v1(596,607) 676,607 717.63,648.63 M2.2
NetM3_2: M3.2 Q5.3 | length 193.1
  Top Layer w15: Q5.3 3271.48,648.52 v1(3311,609)
  Bottom Layer w15: M3.2 3311,660.48 v1(3311,609)
NetM4_2: M4.2 Q6.3 | length 277.7
  Top Layer w15: Q6.3 3329.48,3271.48 v1(3361,3303)
  Bottom Layer w15: M4.2 3298.52,3334 3330,3334 v1(3361,3303)
NetP1_2: P1.2 R25.2 U1.9 | length 1110.7
  Top Layer w10: v1(1783,2589) 1783,2456.46 U1.9 1772.32,2389.68 2252,1910 P1.2
  Bottom Layer w10: v1(1783,2589) 1791.34,2597.34 R25.2
NetP1_3: P1.3 R26.2 U1.10 | length 1164.3
  Top Layer w10: v1(1891,2686) 1891,2584 1850.28,2543.28 U1.10 2286.06,2010 P1.3
  Bottom Layer w10: v1@1889.76,2686 R26.2
NetP1_4: P1.4 R27.2 U1.13 | length 741
  Top Layer w10: U1.13@2084,2466.65 v1(2084,2599) ; U1.13 2088.86,2302.14 2281,2110 P1.4
  Bottom Layer w10: R27.2 2084,2661.08 v1(2084,2599)
NetP1_5: P1.5 R28.2 U1.14 | length 848.7
  Top Layer w15: v1(2165.35,2608.35) 2165.35,2322.65 2278,2210 P1.5
  Bottom Layer w10: v1(2165.35,2608.35) 2165.35,2622.35 2198,2655 2198,2818 2165.35,2850.65 R28.2
NetQ1_1: Q1.1 R9.2 | length 107.6
  Top Layer w10: Q1.1 1338.58,1534.45 R9.2@1358.27,1514.76
NetQ1_2: Q1.2 R17.1 U2.24 | length 683
  Top Layer w10: Q1.2 1393,1593.79 1393,1486 1420,1459 1583,1459 1628,1414 R17.1 1629.31,1398.62 1773,1398.62 1833.02,1338.6 U2.24
NetQ2_1: Q2.1 R17.2 | length 140.6
  Top Layer w10: Q2.1 1614.67,1534.94 R17.2@1594.49,1514.76
NetQ2_2: Q2.2 R9.1 U2.28 | length 1322.3
  Top Layer w10: Q2.2 1556.41,1668 1312,1668 1252,1608 1252,1453 1306.38,1398.62 1358.27,1398.62 1358.27,1289.73 1388.2,1259.8 U2.28
NetR1_1: R1.1 U2.26 | length 473
  Top Layer w10: R1.1@1476.38,1398.62 1476.38,1333.62 1510.8,1299.2 U2.26
NetR2_2: R2.2 R14.1 U1.2 | length 462.7
  Top Layer w10: R14.1@1324.6,2912.4 R14.1 R2.2 1302.1,2996 v1(1374,2996) ; v1(1562,2993.31) U1.2
  Bottom Layer w10: v1(1374,2996) 1376.69,2993.31 v1(1562,2993.31)
NetR3_1: R3.1 U1.3 | length 117.9
  Top Layer w10: R3.1@1535.63,2914.57 U1.3
NetR15_2: R15.2 SW1.2 | length 426.8
  Top Layer w10: R15.2@1443,1141.07 1436,1134.07 1436,1095 1452,1079 1487,1079 1680.88,885.12 SW1.2
NetR16_2: R16.2 SW2.2 | length 159.8
  Top Layer w15: SW2.2 2439.63,885.5 R16.2
NetR20_2: R20.2 U7.6 | length 357.7
  Top Layer w10: U7.6 919.88,2644.12 984,2580 1074,2580 1157.94,2496.06 R20.2
NetR21_2: R21.2 U7.7 | length 257.6
  Top Layer w10: U7.7 969.88,2646.12 1001.83,2614.17 R21.2
NetR22_2: R22.2 U7.2 | length 922.9
  Top Layer w10: v1(714,2858) 743,2829 743,2699 787,2655 787,2518 824.68,2480.32 R22.2 ; U7.2 969.88,3003.88 v1(973,3007)
  Bottom Layer w10: v1(714,2858) 714,2893 778,2957 923,2957 v1(973,3007)
NetSW3_1: SW3.1 SW3.4 | length 177.2
  Top Layer w15: SW3.1 SW3.4
NetSW3_3: SW3.3 U7.5 | length 3076.2
  Top Layer w15: U7.5 878,2689.84 v1(878,2608)
  Bottom Layer w15: v1(878,2608) 878,1822 1158,1542 2675,1542 2824.52,1392.48 SW3.3
NetU2_4: U2.4 USB1.3 | length 182.5
  Top Layer w10: v1(1949,1134) 1949,1143 1968.5,1162.5 U2.4
  Bottom Layer w10: v1(1949,1134) 1967.91,1115.09 USB1.3
NetU2_5: U2.5 USB1.2 | length 373.4
  Top Layer w10: v1@1957,956 1957,984 1949,992 1949,1054 2000,1105 2000,1157.36 1988.2,1169.16 U2.5
  Bottom Layer w10: v1@1957,956 1957,970 1993.5,1006.5 USB1.2@1993.5,1020.5
  other v1: 1947,962
NetU3_5: U3.5 U4.4 U5.4 | length 2195.5
  Bottom Layer w10: U4.4 1259,1907 1296,1944 1681.01,1944 U3.5 1808.2,1913.8 2076,1646 2565,1646 2611,1600 2706,1600 2766,1660 2766,1842 2930.51,2006.51 U5.4
NetU3_6: U3.6 U4.3 U5.3 | length 2317.8
  Top Layer w10: U4.3 1159,1806 1183,1782 1411,1782 1448,1819 v1(1448,1884)
  Bottom Layer w10: v1(1448,1884) 1459,1873 1644,1873 1703.2,1813.8 U3.6 1793.2,1813.8 2034,1573 2749,1573 2849,1673 2849,1827 2928.51,1906.51 U5.3
OUT0: D12.1 P4.2 R8.1 U1.17 | length 1080.7
  Top Layer w15: U1.17 2412.98,2675.98 2441,2704 2591.59,2704 2637.8,2750.2 2750.2,2637.8 R8.1 2756.89,2575.11 2800,2532 2966,2532 3112.03,2678.03 P4.2
PWMA: Q3.1 R10.2 R18.1 U1.6 | length 2306.8
  Top Layer w10: v1(483,3216) 486,3219 486,3214.79 R10.2 ; Q3.1 587.17,3188.98 R10.2 ; R18.1 591.52,3387.52 549.49,3345.49 R10.2 ; v1@1094,2787 1144,2737 1433,2737 1492.44,2677.56 U1.6
  Bottom Layer w10: v1(483,3216) 540,3159 782,3159 868,3073 1016,3073 1059,3030 1059,2983 1000,2924 1000,2841 1057,2784 v1(1091,2784)
PWMB: Q4.1 R11.2 R19.1 U1.7 | length 3357.3
  Top Layer w15: R19.1 549.49,768.49 v1(499,718) 499,615 564.51,549.49 R11.2 785.71,654.29 748.03,691.97 Q4.1 ; v1(651,1003) 862,1214 862,2240 v1(954,2332) ; v1(1124,2336) 1177,2389 1491,2389 1564,2462 1564,2572 1591.21,2599.21 U1.7
  Bottom Layer w15: v1(499,718) 542,761 542,789 628,875 628,980 v1(651,1003) ; v1(954,2332) 1120,2332 v1(1124,2336)
PWMC: Q5.1 R12.2 R23.1 U1.5 | length 4884.8
  Top Layer w10: U1.5 1723.69,2756.69 1732.77,2765.77 1732.77,2880.77 1885,3033 2434,3033 2453,3014 2648,3014 2710,3076 2999,3076 3069,3006 3081,3006 3125,2962 3125,2882 3105,2862 3075,2862 2977,2764 v1(2977,2720) v1@2977,2708 ; v1(2977,2406) 3021,2406 3070,2357 3070,1612 3115,1567 3115,1437 3137,1415 3137,1395 3153,1379 3153,1362 3165,1350 3165,1321 3178,1308 3178,1189 3262,1105 3262,993 3372,883 3372,793 3379.29,785.71 R12.2
  Top Layer w15: R23.1 3339.49,549.49 3427,637 3427,735.71 3377,785.71 3296.71,785.71 3259.03,748.03 Q5.1
  Bottom Layer w10: v1(2977,2406) 2932,2451 2932,2675 v1(2977,2720)
PWMD: Q6.1 R13.2 R24.1 U1.16 | length 2052.9
  Top Layer w15: U1.16 2338.18,2598.82 2454,2483 v1@3072,2483 ; v1(3070,2794) 3109,2794 3387.52,3072.52 R24.1 3366.7,3151.3 3324,3194 3305,3194 3270.65,3228.35 Q6.1 3162,3255.32 3162,3376.82 R13.2
  Bottom Layer w15: v1(3070,2794) 3076,2788 v1@3076,2497
  other v1: 3072,2491
RST: C3.2 Q1.3 R4.1 SW1.1 U1.1 | length 3017.9
  Top Layer w10: v1@1111,2172 1111,1780 1178.43,1712.57 1292.57,1712.57 ; C3.2 1244.35,3046 ; v1(1192,2905) 1244.35,2957.35 1244.35,3046 ; Q1.3 1292.57,1712.57 ; R4.1 1478.19,3135 1382,3135 1358,3111 1358,3079 1325,3046 1244.35,3046 ; R4.1@1542.32,3070.87 U1.1 ; SW1.1 1546.86,1200.14 1522,1225 1304,1225 1227,1302 1227,1647 1292.57,1712.57
  Bottom Layer w10: v1(1109,2172) 1192,2255 v1(1192,2905)
SCL: P2.2 R5.1 U1.20 U3.3 | length 1913.2
  Top Layer w10: P2.2 1610.01,2215 U3.3
  Top Layer w15: v1(1966,2548) 1966,2743 2137.57,2914.57 U1.20 2465.57,2914.57 2539,2988 2701.96,2988 R5.1
  Bottom Layer w10: P2.2 1593,2215 1629,2251 1629,2333 1679,2383 1794,2383 v1@1962.5,2551.5
SDA: P2.3 R6.1 U1.19 U3.4 | length 2559.6
  Top Layer w10: P2.3 1610.01,2115 U3.4
  Top Layer w15: U1.19 2295.81,2849 2715,2849 ; v1@2571,2933 2632,2933 2730.35,2834.65 R6.1
  Bottom Layer w10: U3.4 1992.8,2013.8 2322,2343 2322,2429 2222,2529 2222,2873 2238,2889 2527,2889 v1@2571.5,2933.5
  other v1: 2571,2934
VCC: C9.2 C10.2 C13.2 C14.2 P1.1 P2.1 P3.1 SW3.5 U3.1 U4.1 U5.1 U6.3 | length 6274.3
  Top Layer w10: P2.1 1710.01,2315 U3.1 1740.2,2313.8 2244,1810 P1.1 2399,1799 2399,1722.06 C13.2 ; C14.2 2280.51,1465.42 C10.2 2279.93,1627.93 2355.74,1703.74 C13.2 ; C9.2 2755.07,1636.93 2678,1714 2427.58,1714 C13.2
  Top Layer w15: U6.3 2755.07,1451.92 C9.2 2809.07,1517 2952,1517 2981,1488 2981,1368 3035.26,1313.74 SW3.5 ; v1(2982,3130) 2998,3130 v1(3183,2945)
  Bottom Layer w10: U4.1 959,1921 1255,2217 1366,2217 1464,2315 P2.1
  Bottom Layer w15: P3.1 2539.37,3112.37 2596,3169 2669,3169 2712,3212 2771,3212 2802,3243 2869,3243 v1(2982,3130) ; SW3.5 3053.26,1313.74 3009,1358 3009,1672.51 U5.1 3006.51,1706.51 3067,1767 3067,2398 3012,2453 3012,2681 3042,2711 3042,2753.97 3007,2788.97 3007,2851 3030,2874 3118,2874 v1@3183,2939
pads on no net: M1.3 M1.4 M2.3 M2.4 M3.3 M3.4 M4.3 M4.4 SW1.0 SW2.0 TB1.MP1 TB1.MP2 U1.4 U1.11 U1.12 U2.1 U2.2 U2.9 U2.10 U2.11 U2.12 U2.13 U2.14 U2.15 U2.16 U2.17 U2.18 U2.19 U2.20 U2.21 U2.22 U2.23 U2.27 U3.7 U3.8 U4.5 U5.5 U5.6 U5.7 USB1.0 USB1.4

## Silkscreen, mask and mechanical layers (free items; w line width, h text height)
Top Overlay:
  drawing of 873 lines, arcs and shapes, not listed
  text "UART" at 2891,3209 h35 r45
  text "-" at 2875,3083 h40
  text "RX" at 2775,3053 h40
  text "TX" at 2625,2997 h40
  text "+" at 2547,2974 h40
  text "OUTS" at 3218,2829 h45 r60
  text "IIC" at 1493,2380 h45
  text "SPI" at 2330,2380 h45
  text "+" at 1476,2339 h40 r180
  text "-" at 2450,2316 h40 r270
  text "SCL" at 1476,2189 h30 r90
  text "CS" at 2485,2186 h30 r90
  text "SDA" at 1478,2072 h30 r90
  text "MISO" at 2484,2071 h25 r90
  text "-" at 1442,2016 h40 r270
  text "MOSI" at 2483,1968 h25 r90
  text "SCLK" at 2483,1850 h25 r90
  text "+" at 2487,1825 h40 r180
  text "FLASH" at 2186,1221 h45
  text "RST" at 1564,1219 h60
  text "Vinicio Castillo" at 833,948 h32
  text "Devison industries" at 835,901 h32
Bottom Overlay:
  circle w10: c1968.5,1968.5 r19.68
  lines w30: 984.25,1299.21 984.25,2613 2952.76,2613 2952.76,1299.21 984.25,1299.21
  text "3.7V 1000mAh Li-ion" at 2087,1589 h40 r90
Mechanical 1:
  circle w10: c236.22,236.22 r118.11
  lines w30: 40.58,3620.45 cw(c224.25,3712.95) 315.48,3897.25 ; 44.41,321.4 ccw(c207.88,213.47) 370.87,104.83 ; 44.86,320.84 ccw(c-1299.21,1968.5) 44.96,3616.08 ; 318.65,3894.84 ccw(c1968.5,5236.22) 3616.8,3892.93 ; 370.4,103.42 cw(c1968.5,-1299.21) 3615.18,46.06 ; 3616.41,3893.25 cw(c3713.77,3712.83) 3897.51,3621.87 ; 3618.01,42.48 ccw(c3713.6,223.24) 3893.72,320.01 ; 3893.72,319.56 cw(c5236.22,1968.5) 3898.17,3621.06

## Text inside footprints (layer, text, board x,y; h text height)
C7: Mechanical 13 "+" at 2187,2764 h60
U1: Top Overlay "ESP-12" at 1982.5,2626.87 h60 r90